# Altium PCB PCB1.PcbDoc
Units mil, origin at the board's own origin, x right, y up, seen from the top; angles counter-clockwise.
Board outline 6441.25 x 3007.46 mil, 2 copper layers (Top, Bottom); 30 components, 35 nets, 166 pads, 49 vias.
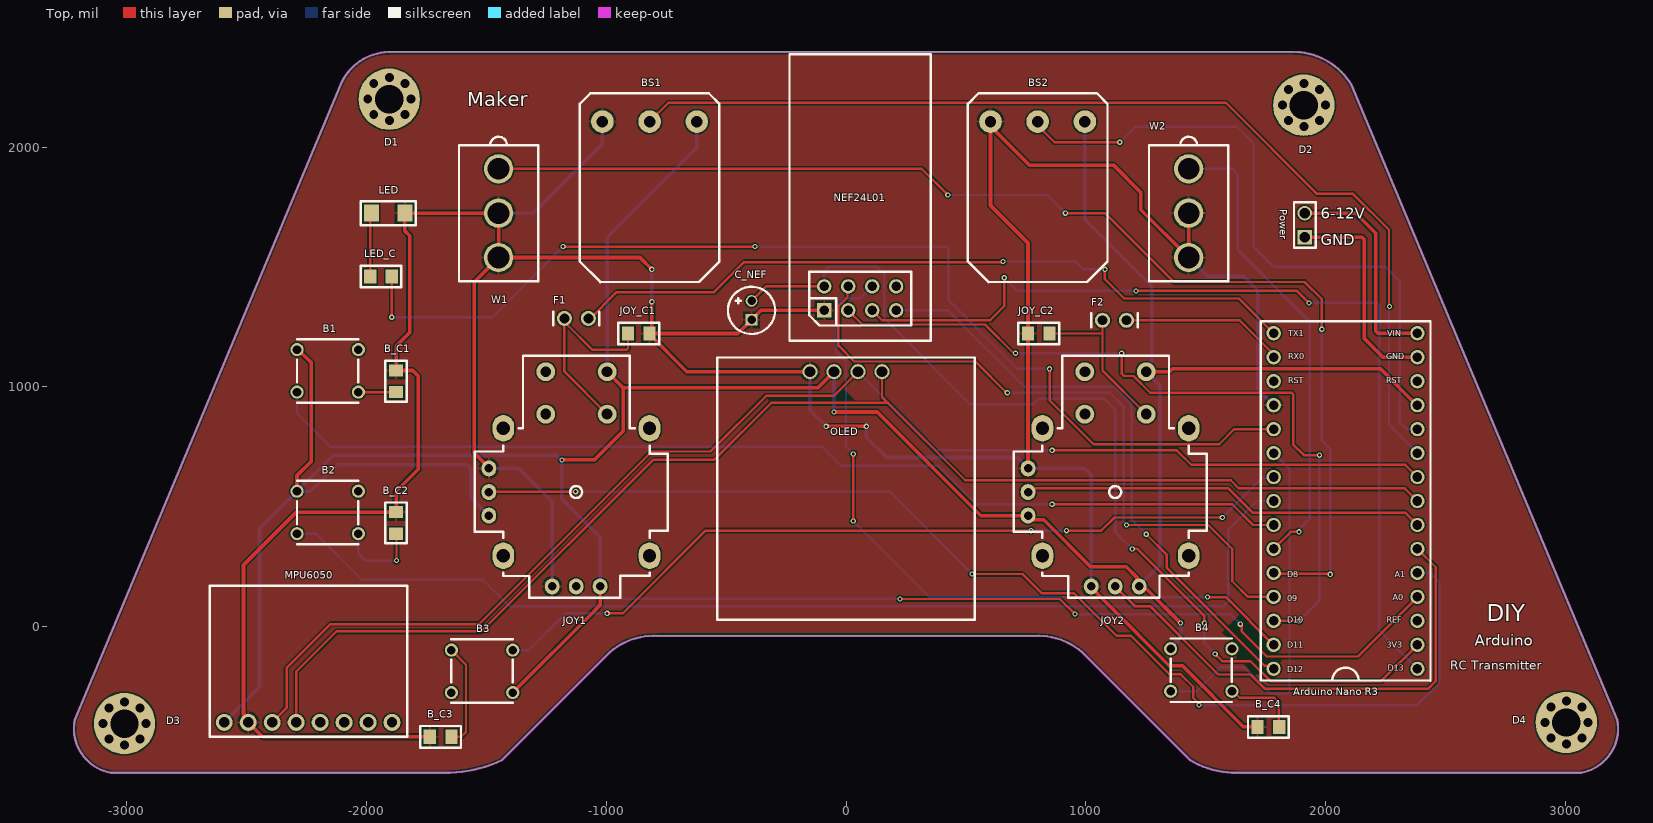
[diagram p0: Top view]
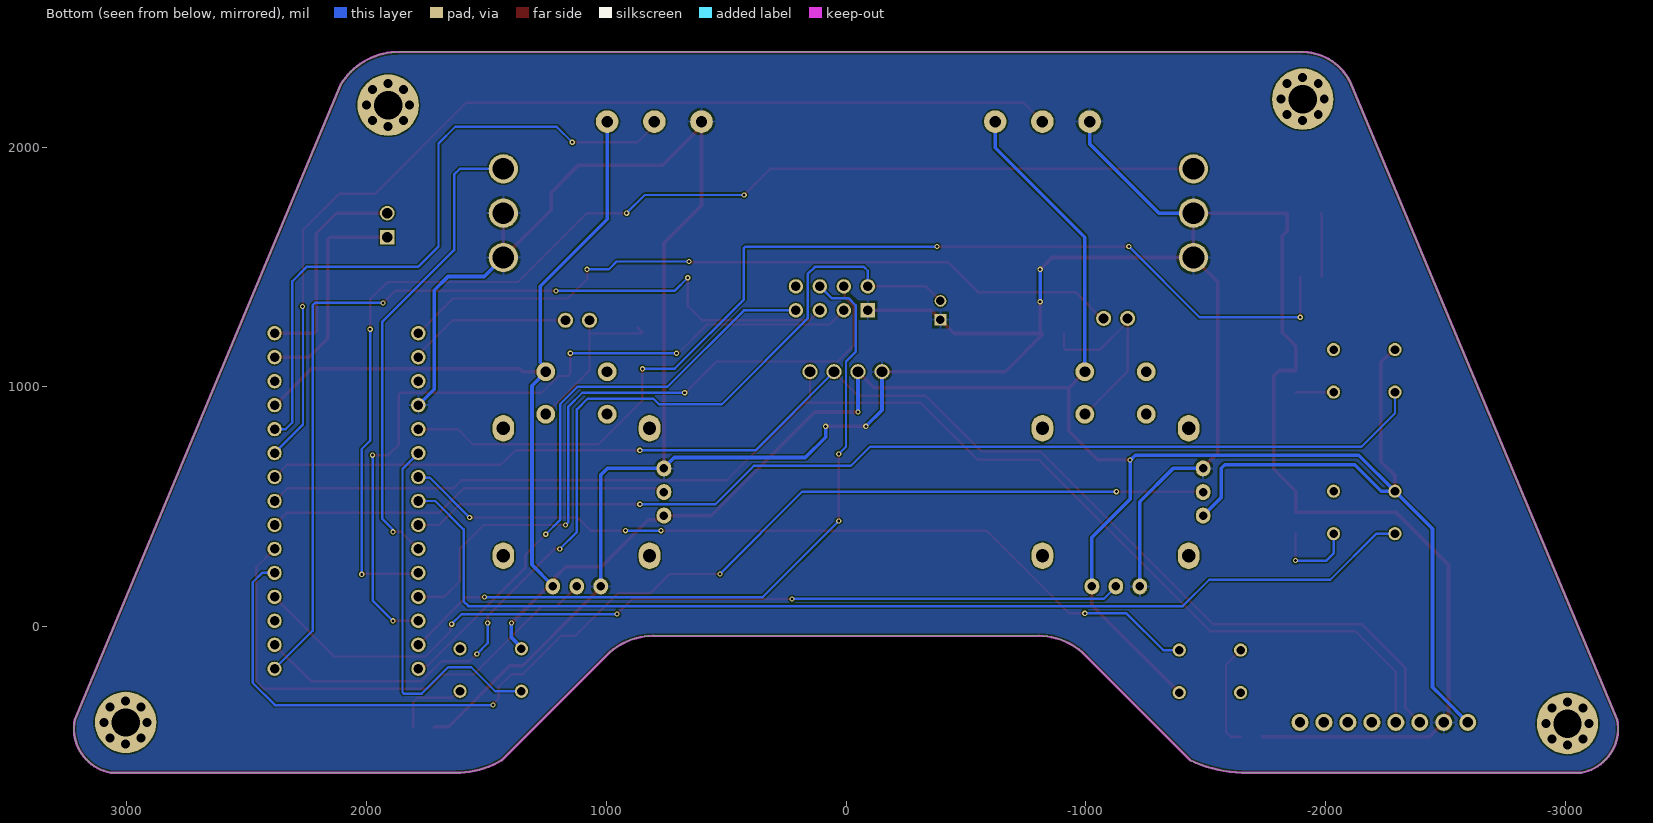
[diagram p1: Bottom view, seen from below]

## Layer stack, top to bottom
Top Solder: solder mask 0.4, Solder Resist, Dk 3.5
Top: signal copper 1.4
Dielectric 1: dielectric 12.6, FR-4, Dk 4.8
Bottom: signal copper 1.4
Bottom Solder: solder mask 0.4, Solder Resist, Dk 3.5

## Board outline
-3067.72,-610 -1650.39,-610 ccw(c-1665.98,-81.56) -1435.26,-557.23 -1009.82,-131.79 cw(c-802.5,-316.88) -787.4,-39.37 787.4,-39.37 cw(c802.5,-316.88) 1009.82,-131.79 1435.26,-557.23 ccw(c1628.93,-232.6) 1650.39,-610 3067.72,-610 ccw(c3032.56,-425.16) 3217.4,-390 2107.91,2261.22 2099.01,2274.21 ccw(c1866.25,2114.71) 1862.39,2396.85 1866.25,2396.85 -1893.92,2396.85 ccw(c-1901.46,2172.13) -2107.91,2261.22 -3217.4,-390 ccw(c-3032.56,-425.16)

## Design rules (kind name [scope] priority, off if disabled: settings)
Clearance [All] p1: gap=6 ignorepadtopadclearanceinfootprint=FALSE
PlaneClearance [All] p1: clearance=8
PolygonConnect [All] p1: thpad.connectstyle=Relief thpad.reliefconductorwidth=10 thpad.reliefentries=4 thpad.polygonreliefangle="90 Angle" thpad.airgapwidth=10 smdpad.connectstyle=Relief smdpad.reliefconductorwidth=10 smdpad.reliefentries=4 smdpad.polygonreliefangle="90 Angle" smdpad.airgapwidth=10 via.connectstyle=Direct via.reliefconductorwidth=10 via.reliefentries=4 via.polygonreliefangle="90 Angle" via.airgapwidth=10
RoutingVias [All] p1: holewidth=12 width=22 viastyle="Through Hole" minholewidth=12 minwidth=22 maxholewidth=12 maxwidth=22
SilkToSilkClearance [All] p1: silktosilkclearance=2
SilkToSolderMaskClearance [IsPad] p1: minsilkscreentomaskgap=2 clearancetoexposedcopper=TRUE
SolderMaskExpansion [All] p1: expansion=4 istentingtop=FALSE
Width PWR [InNetClass('PWR')] p1: maxlimit=60 minlimit=15 preferedwidth=15
Width [All] p2: maxlimit=10 minlimit=6 preferedwidth=10
27 further rules are at their usual default settings.

## Classes and differential pairs
net class PWR: GGND GND VCC VIN

## Components (designator, comment, footprint, x,y, rotation, side; value= is the part's Value field where it differs from the comment)
"Arduino Nano R3" "NANO" ? 2083.86,523.62 r180 top locked (schematic designator NANO)
B1 "按键开关" 按键开关 -2162.05,1066.54 r90 top locked
B2 "按键开关" 按键开关 -2162.05,475.98 r90 top locked
B3 "按键开关" 按键开关 -1518.11,-187.01 r270 top locked
B4 "按键开关" 按键开关 1482.05,-181.42 r90 top locked
B_C1 "电阻" 0805 -1876.61,1022.95 r90 top locked
B_C2 "电阻" 0805 -1876.61,432.4 r90 top locked
B_C3 "电阻" 0805 -1691.06,-460 r180 top locked
B_C4 "电阻" 0805 1761.85,-419.63 r180 top locked
BS1 "电位器" WH148 -819.29,2106.3 r0 top locked
BS2 "电位器" WH148 799.61,2106.3 r0 top locked
C_NEF "电容" 电容 -394.09,1318.9 r90 top locked
D1 "定位孔" 散热孔 -1905,2200 r0 top locked
D2 "定位孔" 散热孔 1910,2175 r0 top locked
D3 "定位孔" 散热孔 -3010,-405 r0 top locked
D4 "定位孔" 散热孔 3005,-400 r0 top locked
F1 "隔空插针" 跳线帽 -1125,1285.47 r0 top locked
F2 "隔空插针" 跳线帽 1120,1277.6 r0 top
JOY1 "JOYSTICK" 摇杆 -1154.41,615.16 r0 top locked
JOY2 "JOYSTICK" 摇杆 1094.41,615.16 r0 top locked
JOY_C1 "摇杆电阻1" 0805 -864.29,1222.48 r180 top locked
JOY_C2 "摇杆电阻2" 0805 804.29,1222.48 r0 top locked
LED "LED" 1206 -1910,1724.41 r0 top locked
LED_C "电阻" 0805 -1940,1460 r180 top locked
MPU6050 "MPU6050" MPU6050 -2243.74,-400 r0 top locked
NEF24L01 "Nef24L01" Nef24L01 59.06,1368.9 r0 top locked
OLED "OLED" OLED 0,1062.99 r0 top locked
Power "电源" 电源 1913.78,1674.41 r90 top locked
W1 "拨动开关" 拨动开关 -1449.21,1724.41 r0 top locked
W2 "拨动开关" 拨动开关 1429.53,1724.41 r0 top locked

## Footprints (in the part's own frame and the unit in brackets; to place one, negate y for a bottom-side part, rotate by r counter-clockwise, add the part's x,y. Pads: shape width x height; smd on the part's side, far side on the other; paste and mask are expansions set on the pad)
0805 [mm]
  rect 1.3x1.5 smd: 1(-1.143,0) 2(1.143,0)
  silkscreen extent -2.16,-1.14 2.16,1.14, body extent -1,-0.63 1,0.63, height 0.55
1206 [mm]
  rect 1.6x1.8 smd: GND(1.778,0) VCC(-1.778,0)
  silkscreen extent -2.92,-1.27 2.92,1.27, body extent -1.6,-0.8 1.6,0.8, height 1.1
MPU6050 [mm]
  round 1.8 hole 1.1: AD0(6.35,0) GND(-6.35,0) INT(8.89,0) SCL(-3.81,0) SDA(-1.27,0) VCC(-8.89,0) XCL(3.81,0) XDA(1.27,0)
  silkscreen extent -10.41,-1.52 10.5,14.48
Nef24L01 [mil]
  round 60 hole 39: 3V3(-150,50) CE(-50,-50) CSN(-50,50) IRQ(150,50) MISO(150,-50) MOSI(50,50) SCK(50,-50)
  rect 60x60 hole 39: GND(-150,-50)
  silkscreen extent -295,-177 295,1018
OLED [mm] "0.96"
  round 1.6 hole 1.15: GND(-3.81,0) SCL(1.27,0) SDA(3.81,0) VCC(-1.27,0)
  silkscreen extent -13.66,-26.3 13.66,1.5
WH148 [mm] "10k 5mm间距"
  round 2.4 hole 1.2: D(0,0) GND(-5,0) VCC(5,0)
  silkscreen extent -7.4,-17.01 7.4,3
拨动开关 [mm]
  round 3.1 hole 2.3: GND(0,-4.7) GND(0,0) NO(0,4.7)
  silkscreen extent -4.2,-7.2 4.2,8.09
按键开关 [mil]
  round 55 hole 36: 4(88.58,-127.95) K-G(-88.58,-127.95) S(-88.58,127.95) VCC(88.58,127.95)
  silkscreen extent -134,-128 131,128
摇杆 [mm]
  oval 2.3x2.8 hole 1.4: 1(-6.988,5.375) 2(-6.988,-8.125) 3(8.512,-8.125) 4(8.512,5.375)
  round 2 hole 1.15: 5(-2.488,11.375) 6(-2.488,6.875) S+(4.012,11.375) S-(4.012,6.875)
  oval 1.55x1.7 hole 0.9: 5V(-8.512,-3.875) 5V(3.262,-11.375) GND(-8.512,1.125) GND(-1.818,-11.375) X(0.722,-11.375) Y(-8.512,-1.375)
  silkscreen extent -10.01,-12.58 10.42,13.09
散热孔 [mil]
  round 255.91 hole 118.11: 1(0,0)
  round 0 hole 37.4: 2(-90,0) 2(0,-90) 2(0,90) 2(90,0) 3(-65,-65) 3(-65,65) 3(65,-65) 3(65,65)
电容 [mm]
  round 1.24 hole 0.9: 3V3(1,0)
  rect 1.24x1.24 hole 0.9: GND(-1,0)
  silkscreen extent -2.5,-2.5 2.5,2.5
电源 [mm]
  rect 1.54x1.54 hole 1.1: GGND(-1.27,0)
  round 1.54 hole 1.1: VVIN(1.27,0)
  silkscreen extent -2.41,-1.15 2.41,1.14
跳线帽 [mm]
  round 1.6 hole 1.05: 1(-1.27,0) 2(1.27,0)
  silkscreen extent -2.45,-0.72 2.45,0.72
? [mil]
  round 59.06 hole 40: 1(-300,700) 30(300,700)
  round 60 hole 40: 3(-300,500) 3V3(-300,600) 4(-300,400) 5(-300,300) 5V(-300,-400) 6(-300,200) 7(-300,100) 8(-300,0) 9(-300,-100) 10(-300,-200) 11(-300,-300) 13(-300,-500) 20(300,-300) 21(300,-200) 22(300,-100) 23(300,0) 24(300,100) 25(300,200) 26(300,300) 27(300,400) 28(300,500) 29(300,600) GND(-300,-600) GND(300,-400) RST(300,-500) RX(300,-600) TX(300,-700) VIN(-300,-700)
  silkscreen extent -354,-750 354,750

## Part data
"Arduino Nano R3": "Arduino"
B1 B2 B3 B4: "自复位"
BS1 BS2: "S/V/G"
JOY1 JOY2: "PS摇杆"
JOY_C1 JOY_C2: library part 电阻
MPU6050: "加速度计"
NEF24L01: "board"
OLED: "0.96"

## Via types
v1: diameter 22, hole 12, Top to Bottom, 49 vias

## Nets (pads, with @x,y where several pads share a name; then routed paths per layer and width w, separated by ;. In a path a pad name is that pad's centre, name@x,y a point inside that pad or via, vN(x,y) a via of type N, cw(c..) or ccw(c..) an arc to the next point about the centre after c; other vN are vias at no path point)
GGND: "Arduino Nano R3.GND"@2383.86,1123.62 Power.GGND | length 919.4
  Top w15: Power.GGND 2152.32,1624.41 2161.1,1615.62 2161.1,1202.68 2240.16,1123.62 2383.86,1123.62
GND: "Arduino Nano R3.GND"@1783.86,923.62 B_C1.2 B_C2.2 B_C3.2 B_C4.2 BS1.GND BS2.GND C_NEF.GND JOY1.GND JOY2.GND JOY_C1.1 JOY_C2.1 LED.GND MPU6050.GND NEF24L01.GND OLED.GND W1.GND W2.GND | length 15384
  Top w15: B_C3.2 -2433.74,-460 MPU6050.GND -2493.74,-384.88 -2513.51,-365.11 -2513.51,256.49 -2292.6,477.4 B_C2.2 -1876.61,564.57 -1785,656.18 -1785,1045 -1807.95,1067.95 B_C1.2 -1876.61,1170 -1820,1226.61 -1820,1630 -1840,1650 LED.GND -1449.21,1724.41 W1.GND@-1449.21,1539.37 ; JOY1.GND@-1489.53,659.45 -1489.53,662.4 -1550,722.87 -1550,1438.58 W1.GND@-1449.21,1539.37 ; v1(-810,1355) -810,1231.77 JOY_C1.1 ; v1(-810,1490) -859.37,1539.37 W1.GND@-1449.21,1539.37 ; OLED.GND -663.74,1062.99 -819.29,1218.54 JOY_C1.1 ; NEF24L01.GND -354.72,1318.9 C_NEF.GND -451.14,1222.48 JOY_C1.1 ; v1(-82.72,835) v1(85,835) ; BS2.GND BS2.GND@602.76,2087.24 ; JOY2.GND@759.29,659.45 JOY_C2.1 759.29,1600 602.76,1756.54 BS2.GND@602.76,2087.24 ; JOY2.GND@1022.83,167.32 1022.83,162.51 1090.98,94.37 1349.1,-163.75 1403.75,-163.75 1657.78,-417.78 1715,-417.78 B_C4.2 ; W2.GND@1429.53,1724.41 1429.53,1539.37 1230,1738.9 1230,1810.86 1115.86,1925 765,1925 BS2.GND@602.76,2087.24 ; 1783.86,923.62 1796.04,923.62
  Bottom w15: JOY1.GND@-1489.53,659.45 -1364.45,659.45 -1225.98,520.98 JOY1.GND@-1225.98,167.32 ; W1.GND@-1449.21,1724.41 -1305.59,1724.41 -1016.14,2013.86 BS1.GND ; v1(-810,1355) v1(-810,1490) ; OLED.GND -150,902.28 v1(-82.72,835) ; v1(85,835) 85,790 170,705 716.69,705 759.29,662.4 759.29,659.45 995.37,659.45 1022.83,631.98 JOY2.GND@1022.83,167.32 ; W2.GND@1429.53,1539.37 1508.9,1460 1660,1460 1717.62,1402.38 1717.62,989.86 1783.86,923.62
MISO: "Arduino Nano R3.30" NEF24L01.MISO | length 2508.9
  Top w10: v1(1252.36,385) 1338.36,299 1338.36,243.96 1746.08,-163.75 1757.96,-163.75 1770.58,-176.38 1783.86,-176.38
  Bottom w10: NEF24L01.MISO 426.1,1318.9 745,1000 1119.63,1000 1192.41,927.22 1192.41,444.96 v1(1252.36,385)
NetB1_K-G: B1.K-G B_C1.1 | length 157.5
  Top w10: B1.K-G B_C1.1
NetB1_S: "Arduino Nano R3.24" B1.S | length 4355
  Top w10: v1(860,510) 1611.1,510 1697.48,423.62 1783.86,423.62
  Bottom w10: B1.S -2290,890 -2150,750 -100,750 -20,670 385,670 545,510 v1(860,510)
NetB2_K-G: B2.K-G B_C2.1 | length 367
  Top w10: B_C2.1 -1875,385.79 v1(-1875,275)
  Bottom w10: B2.K-G -2034.09,305 -2004.09,275 v1(-1875,275)
NetB2_S: "Arduino Nano R3.23" B2.S | length 4556.5
  Bottom w10: B2.S -2212.4,387.4 -2020,195 -1515,195 -1405,85 1575,85 1595,105 1595,405 1713.62,523.62 1783.86,523.62
NetB3_K-G: B3.K-G B_C3.1 | length 436.2
  Top w10: B_C3.1 -1605,-460 -1585,-440 -1585,-159.49 B3.K-G
NetB3_S: "Arduino Nano R3.22" B3.S | length 3460.4
  Top w10: v1(-996.46,55) -931.21,55 -586.21,400 759.29,400 ; v1(920,400) 1065,400 1120,455 v1(1570,455)
  Bottom w10: B3.S -1323.43,-98.43 -1170,55 v1(-996.46,55) ; v1(772.01,400) v1(920,400) ; v1(1570,455) 1735.61,620.61 1780.85,620.61 1783.86,623.62
NetB4_K-G: B4.K-G B_C4.1 | length 318.5
  Top w10: B4.K-G 1615.64,-270 1642.87,-297.23 1786.38,-297.23 1805,-315.86 1805,-417.78 B_C4.1
NetB4_S: "Arduino Nano R3.21" B4.S | length 1610.5
  Bottom w10: B4.S 1463.14,-270 1563.14,-170 1660,-170 1770,-280 1844.14,-280 1850,-274.14 1850,657.48 1783.86,723.62
NetBS1_D: "Arduino Nano R3.10" BS1.D | length 4318.7
  Top w10: BS1.D -740.59,2185 1585,2185 1965,1805 2115,1805 2265,1655 2265,1337 v1(2267,1335)
  Bottom w10: v1(2267,1335) 2265,1333 2265,842.48 2383.86,723.62
NetBS2_D: "Arduino Nano R3.11" BS2.D | length 2775.8
  Top w10: BS2.D 799.61,2090.28 869.88,2020 v1(1142.14,2020)
  Bottom w10: v1(1142.14,2020) 1207.14,2085 1630,2085 1700,2015 1700,1585 1785,1500 2250,1500 2310,1440 2310,850.86 2337.24,823.62 2383.86,823.62
NetC_NEF_3V3: "Arduino Nano R3.3V3" C_NEF.3V3 NEF24L01.3V3 | length 4146.6
  Top w10: C_NEF.3V3 -333.46,1418.9 NEF24L01.3V3 ; v1(1194.14,323.62) 1215.5,323.62 1495,44.12 v1(1495,15) ; v1(1540,-115) 1570,-145 1687.27,-145 1770.15,-227.87 2232.36,-227.87 2383.86,-76.38
  Bottom w10: NEF24L01.3V3 -90.94,1484.06 -75,1500 130,1500 160,1470 160,1285 517.78,927.22 780.29,927.22 803.06,950 1078.54,950 1122.83,905.71 1122.83,394.93 v1(1194.14,323.62) ; v1(1495,15) 1495,-70 v1(1540,-115)
NetF1_1: F1.1 JOY1.S- JOY_C1.2 | length 848.1
  Top w10: F1.1 -1175,1280 F1.1@-1175,1263.35 ; JOY1.S- -1175,1064.37 F1.1@-1175,1263.35 ; JOY_C1.2 -909.29,1160.98 -915.15,1155.12 -1058.99,1155.12 -1167.22,1263.35 F1.1@-1175,1263.35
NetF1_2: "Arduino Nano R3.TX" F1.2 | length 3105.2
  Top w10: F1.2@-1072.62,1279.4 -957.02,1395 -550,1395 -425,1520 652.36,1520 v1(655,1522.64) ; v1(1080,1490) 1080,1448.89 1160.45,1368.44 1639.04,1368.44 1783.86,1223.62
  Bottom w10: v1(655,1522.64) 957.36,1522.64 990,1490 v1(1080,1490)
NetF2_1: F2.1 JOY2.S- JOY_C2.2 | length 736.8
  Top w10: JOY_C2.2@869.88,1247.01 849.29,1226.42 JOY_C2.2 1070,1222.48 ; F2.1@1070,1293.35 1070,1222.48 ; JOY2.S- 1070,1068.19 1070,1222.48
NetF2_2: "Arduino Nano R3.RX" F2.2 | length 685.2
  Top w10: F2.2 1170.3,1277.9 1642.1,1277.9 1783.86,1136.14 1783.86,1123.62
NetJOY1_GND: 
NetJOY1_X: "Arduino Nano R3.4" JOY1.X | length 3749.3
  Top w10: v1(225,115) 891.92,115 v1(955,51.92) ; v1(1645,10) 1645,6.75 1650.63,1.12 1650.63,-20.63 1755,-125 2135.24,-125 2383.86,123.62
  Bottom w10: JOY1.X -1125.98,165.98 -1075.21,115.21 224.79,115.21 v1(225,115) ; v1(955,51.92) 1603.08,51.92 v1(1645,10)
NetJOY1_Y: "Arduino Nano R3.5" JOY1.Y | length 4930.2
  Top w10: JOY1.Y -1487.76,562.8 v1(-1127.76,562.8) ; v1(525.84,219.16) 735.84,219.16 813.15,141.85 816.08,138.92 951.08,138.92 1128.2,-38.2 1188.46,-38.2 1349.02,-198.76 1395.89,-198.76 1448.59,-251.46 1448.59,-298.33 1466.95,-316.69 1466.95,-318.7 1472.7,-324.46 v1(1472.7,-327.7)
  Bottom w10: v1(-1127.76,562.8) 182.2,562.8 v1(525.84,219.16) ; v1(1472.7,-327.7) 2382.3,-327.7 2475,-235 2475,185 2436.38,223.62 2383.86,223.62
NetJOY2_X: "Arduino Nano R3.6" JOY2.X | length 2111.2
  Top w10: JOY2.X 1122.83,167.17 1205,85 1268.15,85 1553.15,-200 1687.5,-200 1747.5,-260 2428.28,-260 2460.41,-227.87 2460.41,192.07 2460,192.48 2460,247.48 2383.86,323.62
NetJOY2_Y: "Arduino Nano R3.7" JOY2.Y | length 1694.1
  Top w10: JOY2.Y 772.01,573.74 788.09,573.74 790.66,576.31 1595,576.31 1696.31,475 2332.48,475 2383.86,423.62
NetLED_C_1: "Arduino Nano R3.20" LED_C.1 | length 4541.3
  Top w10: v1(-1895,1290) LED_C.1 ; v1(-1180,1585) v1(-380,1585) ; v1(849.29,1075) 849.29,944.21 1032.85,760.65 1556.79,760.65 1619.76,823.62 1783.86,823.62
  Bottom w10: v1(-1895,1290) -1475,1290 v1(-1180,1585) ; v1(-380,1585) 420.24,1585 426.1,1579.14 426.1,1363.9 715,1075 v1(849.29,1075)
NetLED_C_2: LED.VCC LED_C.2 | length 266.5
  Top w10: LED_C.2 -1985,1719.41 LED.VCC
NetMPU6050_SCL: "Arduino Nano R3.9" MPU6050.SCL OLED.SCL | length 5663
  Top w10: MPU6050.SCL -2333.59,-339.85 -2333.59,-173.59 -2150,10 -1530,10 -810,730 -565,730 -332.26,962.74 -50.25,962.74 OLED.SCL ; v1(860,735) 1379.53,735 1414.53,700 1415,700 1440,675 2332.48,675 2383.86,623.62
  Bottom w10: OLED.SCL 377.99,735 v1(860,735)
NetMPU6050_SDA: "Arduino Nano R3.8" MPU6050.SDA OLED.SDA | length 5663.1
  Top w10: MPU6050.SDA -2293.74,-188.74 -2125,-20 -1520,-20 -805,695 -550,695 -312,933 174.3,933 ; OLED.SDA 150.06,1062.94 150.06,957.24 174.3,933 ; 2383.86,523.62 2331.17,576.31 1638.44,576.31 1604.76,610 497.3,610 174.3,933
NetNANO_25: "Arduino Nano R3.25" W2.NO | length 1984.2
  Top w10: 1783.86,323.62 1855.24,395 v1(1890,395)
  Bottom w10: W2.NO 1610.55,1909.45 1635,1885 1635,1570 1935,1270 1935,450 1890,405 v1(1890,395)
NetNANO_26: "Arduino Nano R3.26" W1.NO | length 5060
  Top w10: W1.NO 315.55,1909.45 v1(425,1800) ; v1(915,1724.41) 1080.59,1724.41 1367.68,1437.32 1912.68,1437.32 1985,1365 v1(1985,1240) ; 1783.86,223.62 1787.42,220.06 2017.7,220.06 v1(2020,217.76)
  Bottom w10: v1(425,1800) 839.41,1800 v1(915,1724.41) ; v1(1985,1240) 1985,775 2020,740 v1(2020,217.76)
NetNANO_27: "Arduino Nano R3.27" NEF24L01.CSN | length 2875.1
  Top w10: NEF24L01.CSN 6.07,1415.91 6.07,1373.9 -31.94,1335.88 -31.94,1171.94 34.51,1105.49 539.51,1105.49 670,975 v1(673.23,975) ; v1(1170,423.62) 1511.1,423.62 1611.1,323.62 1611.1,188.9 1676.38,123.62 1783.86,123.62
  Bottom w10: v1(673.23,975) 1100.36,975 1158.07,917.29 1158.07,435.55 v1(1170,423.62)
NetNANO_28: "Arduino Nano R3.28" NEF24L01.CE | length 3221.1
  Top w10: NEF24L01.CE 67.95,1260 580,1260 700,1140 v1(707.5,1140) ; v1(1150,1140) 1150,1055 1160,1045 1199.12,1045 1269.12,975 1859.14,975 1865,969.14 1865,760 1910,715 v1(1975,715) ; 1783.86,23.62 v1(1890,23.62)
  Bottom w10: v1(707.5,1140) v1(1150,1140) ; v1(1890,23.62) 1975,108.62 v1(1975,715)
NetNANO_29: "Arduino Nano R3.29" NEF24L01.MOSI | length 3078.5
  Top w10: v1(30,440) v1(30,720) ; v1(1507.86,122.86) 1584.62,122.86 1783.86,-76.38
  Bottom w10: v1(30,440) 347.14,122.86 v1(1507.86,122.86) ; v1(30,720) 0,750 0,1105 -40,1145 -40,1340 -10,1370 60.16,1370 NEF24L01.MOSI
SCK: "Arduino Nano R3.1" NEF24L01.SCK | length 3905.4
  Top w10: NEF24L01.SCK 150.06,1277.9 601.13,1277.9 660,1336.77 v1(660,1455) ; v1(1210,1400) 1881.38,1400 v1(1931.38,1350)
  Bottom w10: v1(660,1455) 715,1400 v1(1210,1400) ; v1(1931.38,1350) 2215,1350 2225,1340 2225,-17.52 2383.86,-176.38
VCC: "Arduino Nano R3.5V" B1.VCC B2.VCC B3.VCC B4.VCC BS1.VCC BS2.VCC JOY1.5V JOY1.S+ JOY2.5V JOY2.S+ MPU6050.VCC OLED.VCC | length 13218.7
  Top w15: B2.VCC -2290,630 -2230,690 -2230,1100 -2285.12,1155.12 B1.VCC ; B3.VCC -1050.48,64.08 -1050.48,65.15 -1025.98,89.65 JOY1.5V@-1025.98,167.32 ; v1(-1185,695) -1050,695 -930,815 -930,996.54 ; JOY1.S+ -930,996.54 ; v1(-50,895) 130,895 562.4,462.6 768.79,462.6 786.2,445.19 824.81,445.19 1020,250 1168.87,250 1214.03,204.84 JOY2.5V@1214.03,176.13 ; OLED.VCC -116.46,996.54 -930,996.54 ; JOY2.5V@1222.83,167.32 1234.59,155.56 1255.2,155.56 v1(1395.76,15) ; JOY2.S+ 1350,1062.99 1362.01,1075 2230,1075 2381.38,923.62 2383.86,923.62
  Bottom w15: MPU6050.VCC -2488.74,-295 -2446.73,-252.99 -2446.73,407.84 B2.VCC ; JOY1.5V@-1489.53,462.6 -1565,538.07 -1565,660.09 -1579.91,675 -2122.72,675 -2233.15,564.57 B2.VCC ; JOY1.5V@-1025.98,167.32 -1025.98,371.97 -1185,530.98 v1(-1185,695) -1186.89,695 -1206.89,715 -2139.57,715 B2.VCC ; JOY1.S+ -996.46,1623.54 -622.44,1997.56 BS1.VCC ; v1(-50,895) OLED.VCC ; BS2.VCC 996.46,1698.54 1275,1420 1275,1102.88 1264.37,1092.25 1264.37,1075 JOY2.S+ 1252.36,1062.64 1310,1005 1310,257.44 1222.83,170.28 JOY2.5V@1222.83,167.32 ; B4.VCC 1354.09,-87.78 1395.76,-46.11 v1(1395.76,15)
VIN: "Arduino Nano R3.VIN" Power.VVIN | length 916.6
  Top w15: Power.VVIN 2126.18,1724.41 2210,1640.59 2210,1232.41 2218.79,1223.62 2383.86,1223.62
pads on no net: "Arduino Nano R3.3" "Arduino Nano R3.13" "Arduino Nano R3.RST" B1.4 B2.4 B3.4 B4.4 D1.1 D1.2 D1.3 D2.1 D2.2 D2.3 D3.1 D3.2 D3.3 D4.1 D4.2 D4.3 JOY1.1 JOY1.2 JOY1.3 JOY1.4 JOY1.5 JOY1.6 JOY2.1 JOY2.2 JOY2.3 JOY2.4 JOY2.5 JOY2.6 MPU6050.AD0 MPU6050.INT MPU6050.XCL MPU6050.XDA NEF24L01.IRQ

## Polygon pours and split planes (outlines as drawn)
GND on Top "Top-No Net" (solid, pour order 7): -3067.72,-610 -1650.39,-610 ccw(c-1665.98,-81.56) -1435.26,-557.23 -1009.82,-131.79 cw(c-802.5,-316.88) -787.4,-39.37 787.4,-39.37 cw(c802.5,-316.88) 1009.82,-131.79 1435.26,-557.23 ccw(c1628.93,-232.6) 1650.39,-610 3067.72,-610 ccw(c3032.56,-425.16) 3217.4,-390 2107.91,2261.22 2099.01,2274.21 ccw(c1866.25,2114.71) 1862.39,2396.85 1866.25,2396.85 -1893.92,2396.85 ccw(c-1901.46,2172.13) -2107.91,2261.22 -3217.4,-390 ccw(c-3032.56,-425.16)
GND on Bottom "Top-No Net" (solid, pour order 8): -3067.72,-610 -1650.39,-610 ccw(c-1665.98,-81.56) -1435.26,-557.23 -1009.82,-131.79 cw(c-802.5,-316.88) -787.4,-39.37 787.4,-39.37 cw(c802.5,-316.88) 1009.82,-131.79 1435.26,-557.23 ccw(c1628.93,-232.6) 1650.39,-610 3067.72,-610 ccw(c3032.56,-425.16) 3217.4,-390 2107.91,2261.22 2099.01,2274.21 ccw(c1866.25,2114.71) 1862.39,2396.85 1866.25,2396.85 -1893.92,2396.85 ccw(c-1901.46,2172.13) -2107.91,2261.22 -3217.4,-390 ccw(c-3032.56,-425.16)

## Keep-outs
Keep-Out Layer:
  lines w10: 1862.39,2396.85 cw(c1866.25,2114.71) 2099.01,2274.21 2107.91,2261.22 3217.4,-390 cw(c3032.56,-425.16) 3067.72,-610 1650.39,-610 cw(c1628.93,-232.6) 1435.26,-557.23 1009.82,-131.79 ccw(c802.5,-316.88) 787.4,-39.37 -787.4,-39.37 ccw(c-802.5,-316.88) -1009.82,-131.79 -1435.26,-557.23 cw(c-1665.98,-81.56) -1650.39,-610 -3067.72,-610 cw(c-3032.56,-425.16) -3217.4,-390 -2107.91,2261.22 cw(c-1901.46,2172.13) -1893.92,2396.85 1866.25,2396.85

## Other copper
Top:
  pour cut-out: 1570,-24.93 1617.84,-5 1628.11,10 1642.87,44.12 1642.61,49.01
  pour cut-out: 1600,-40 1600,-96.95 1703.05,-200 1759.89,-200 1814.89,-145 1814.89,-127.9 1642.87,44.12
  pour cut-out: 1610,-5 1647.21,-5 1778.43,-136.22 1728.71,-185.93 1728.71,-183.64 1570,-24.93
  pour cut-out: -50.25,962.74 -39.88,952.37 -39.88,933 50,933 -13.37,996.37 -16.62,996.37
  pour cut-out: -332.26,962.74 -332.26,953.25 -312,933 -39.88,933 -39.88,952.37 -50.25,962.74
Bottom:
  pour cut-out: -50.94,1358.9 -50.94,1351.99 -48.87,1349.92 -41.22,1349.92 -9.09,1382.04 -9.09,1387.26 -15.06,1393.22 -16.62,1393.22

## Silkscreen, mask and mechanical layers (free items; w line width, h text height)
Top Overlay:
  text "Maker" at -1580,2170 h60
  text "6-12V" at 1979.43,1700.49 h45.28
  text "GND" at 1979.43,1590.49 h45.28
  text "TX1" at 1845,1210 h25
  text "VIN" at 2257,1210 h25
  text "RX0" at 1845,1115 h25
  text "GND" at 2252.83,1115 h25
  text "RST" at 1845,1015 h25
  text "RST" at 2252.83,1015 h25
  text "D8" at 1840,205 h25
  text "A1" at 2289.16,205 h25
  text "A0" at 2280.83,110 h25
  text "09" at 1840,105 h25
  text "DIY" at 2672.87,22.87 h70
  text "D10" at 1840,15 h25
  text "REF" at 2255.83,15 h25
  text "Arduino" at 2622.87,-79.96 h45
  text "D11" at 1840,-87.83 h25
  text "3V3" at 2255.83,-87.83 h25
  text "RC Transmitter" at 2520,-180 h37
  text "D13" at 2260,-185 h25
  text "D12" at 1840,-190 h25